# Altium PCB DE-130817.PcbDoc (part 1 of 4)
Units mil, origin at the board's own origin, x right, y up, seen from the top; angles counter-clockwise.
Board outline 5915.54 x 7594.09 mil, 2 copper layers (Top Layer, Bottom Layer), stack 12.8 mil thick; 405 components, 290 nets, 1180 pads, 331 vias.
Unrouted connection lines stored in the file: 1.
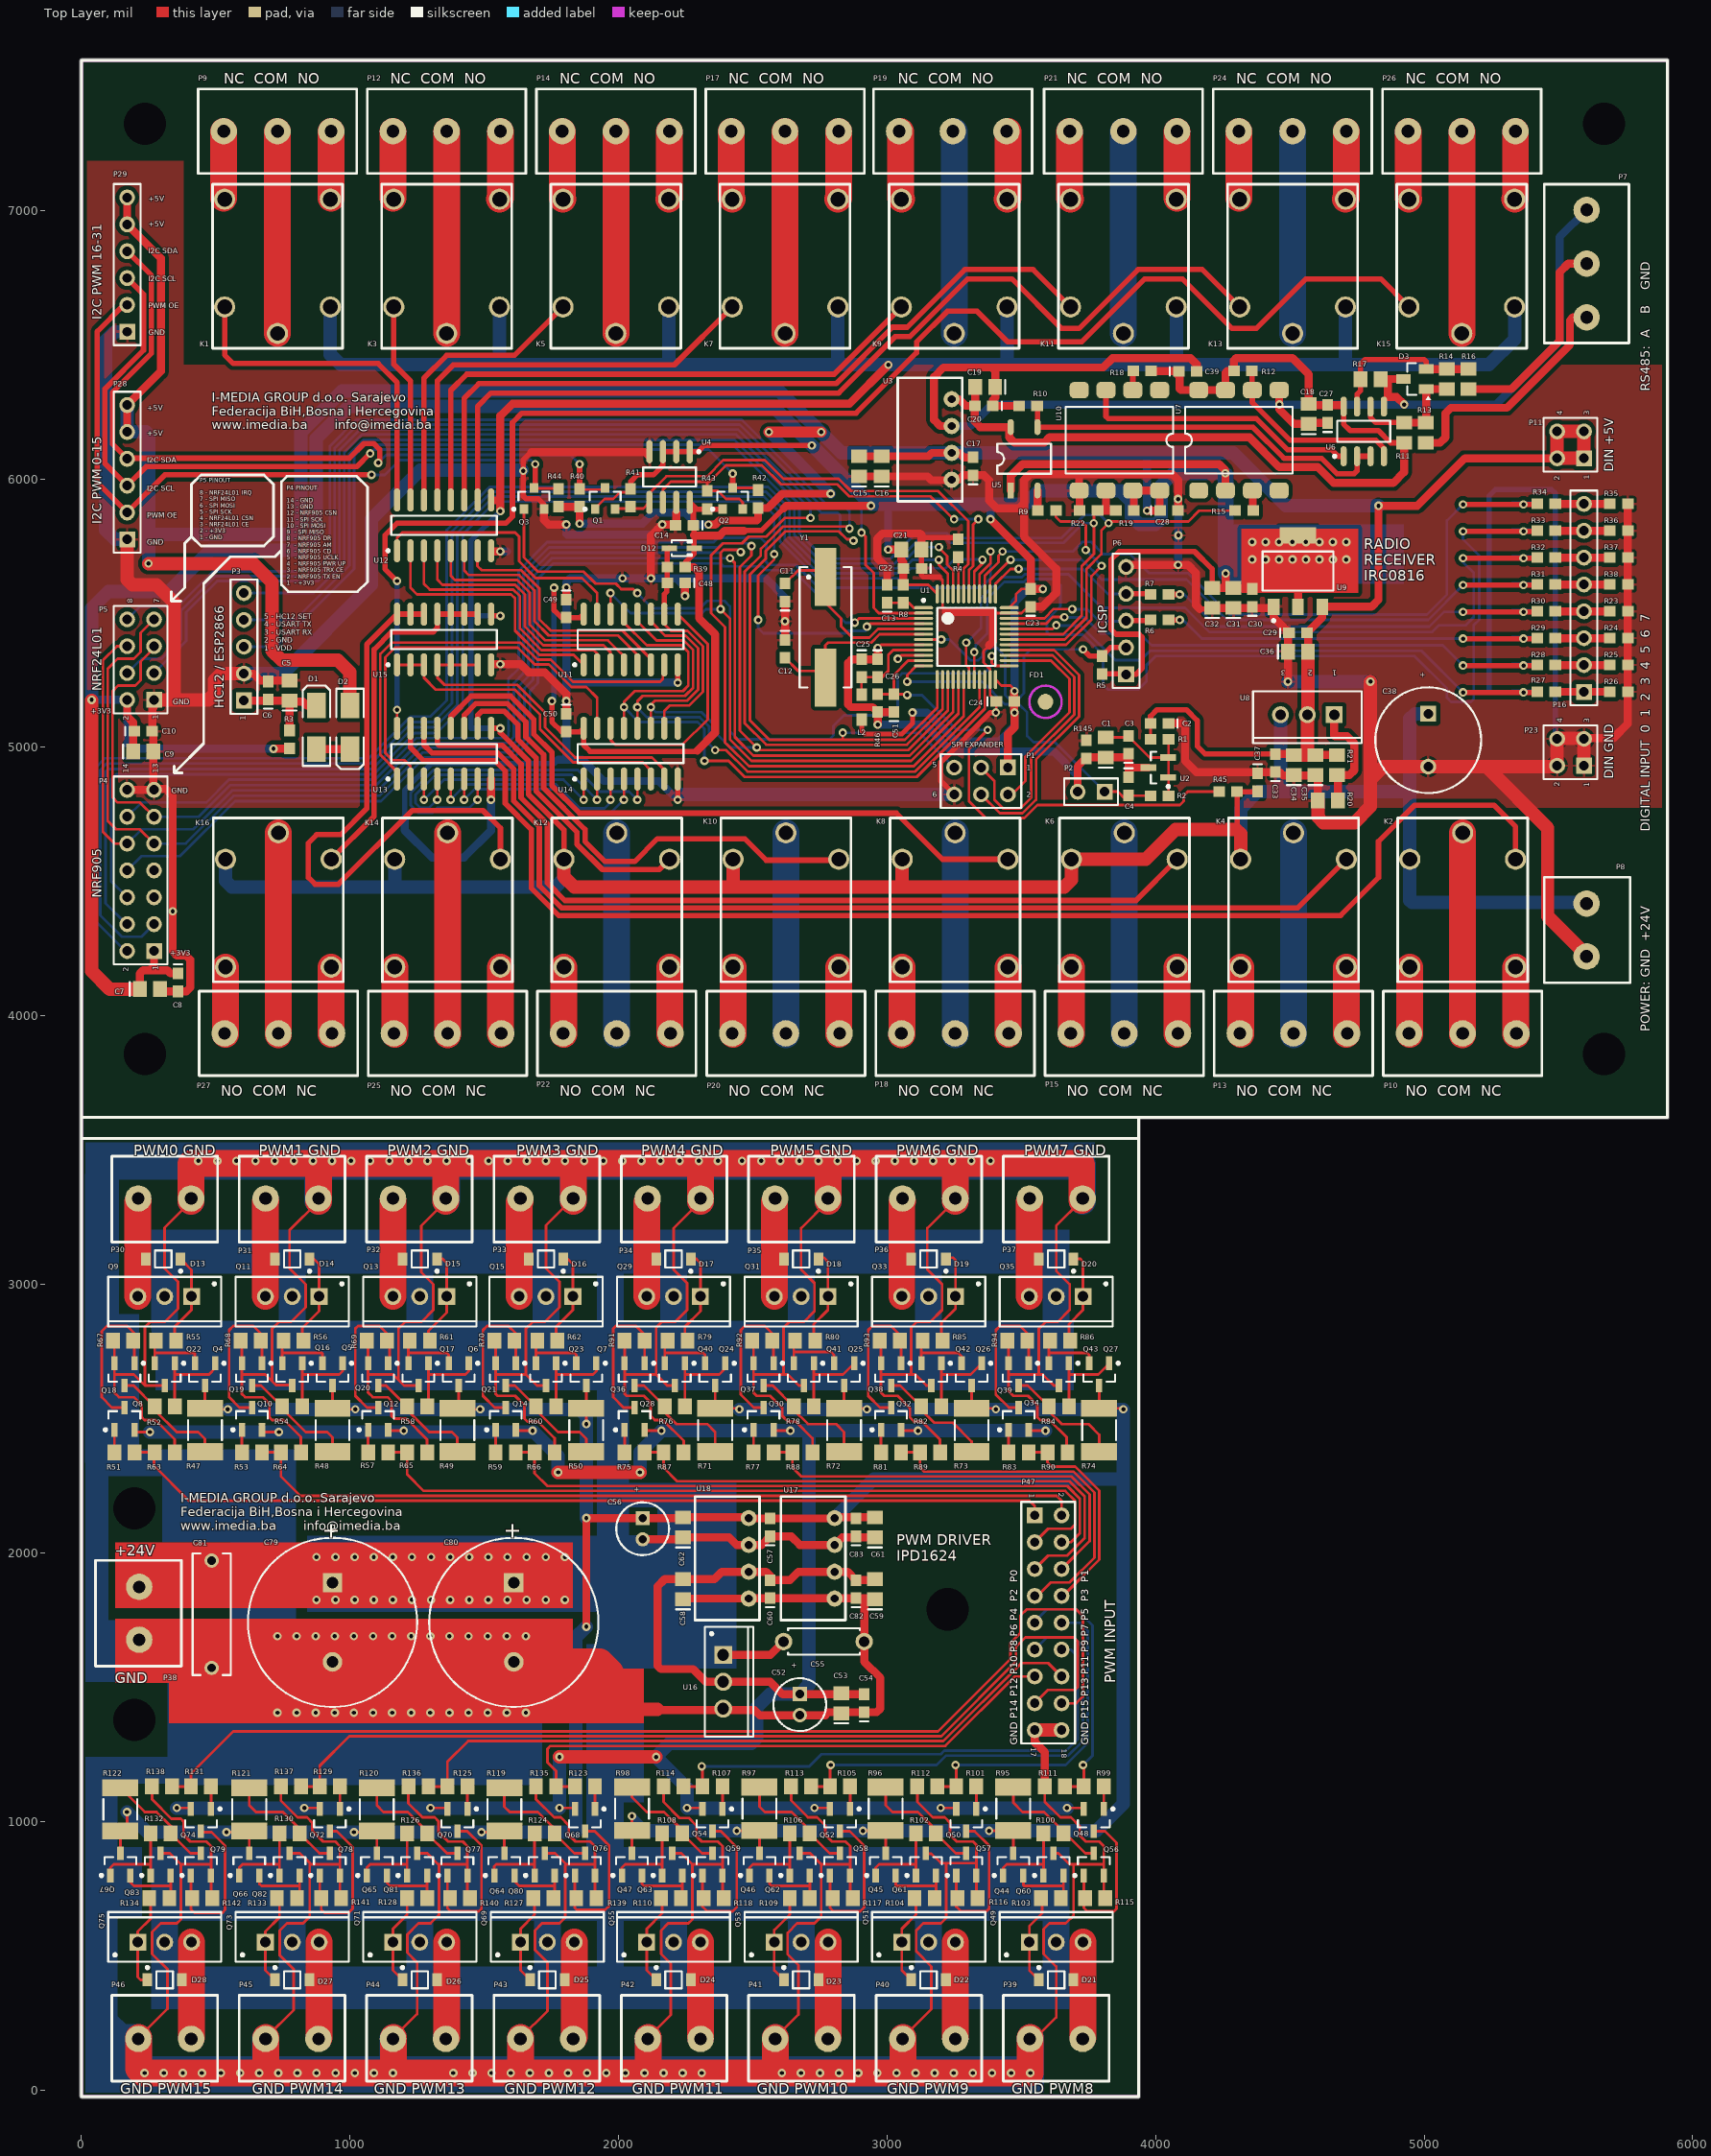
[diagram p0: Top Layer view]
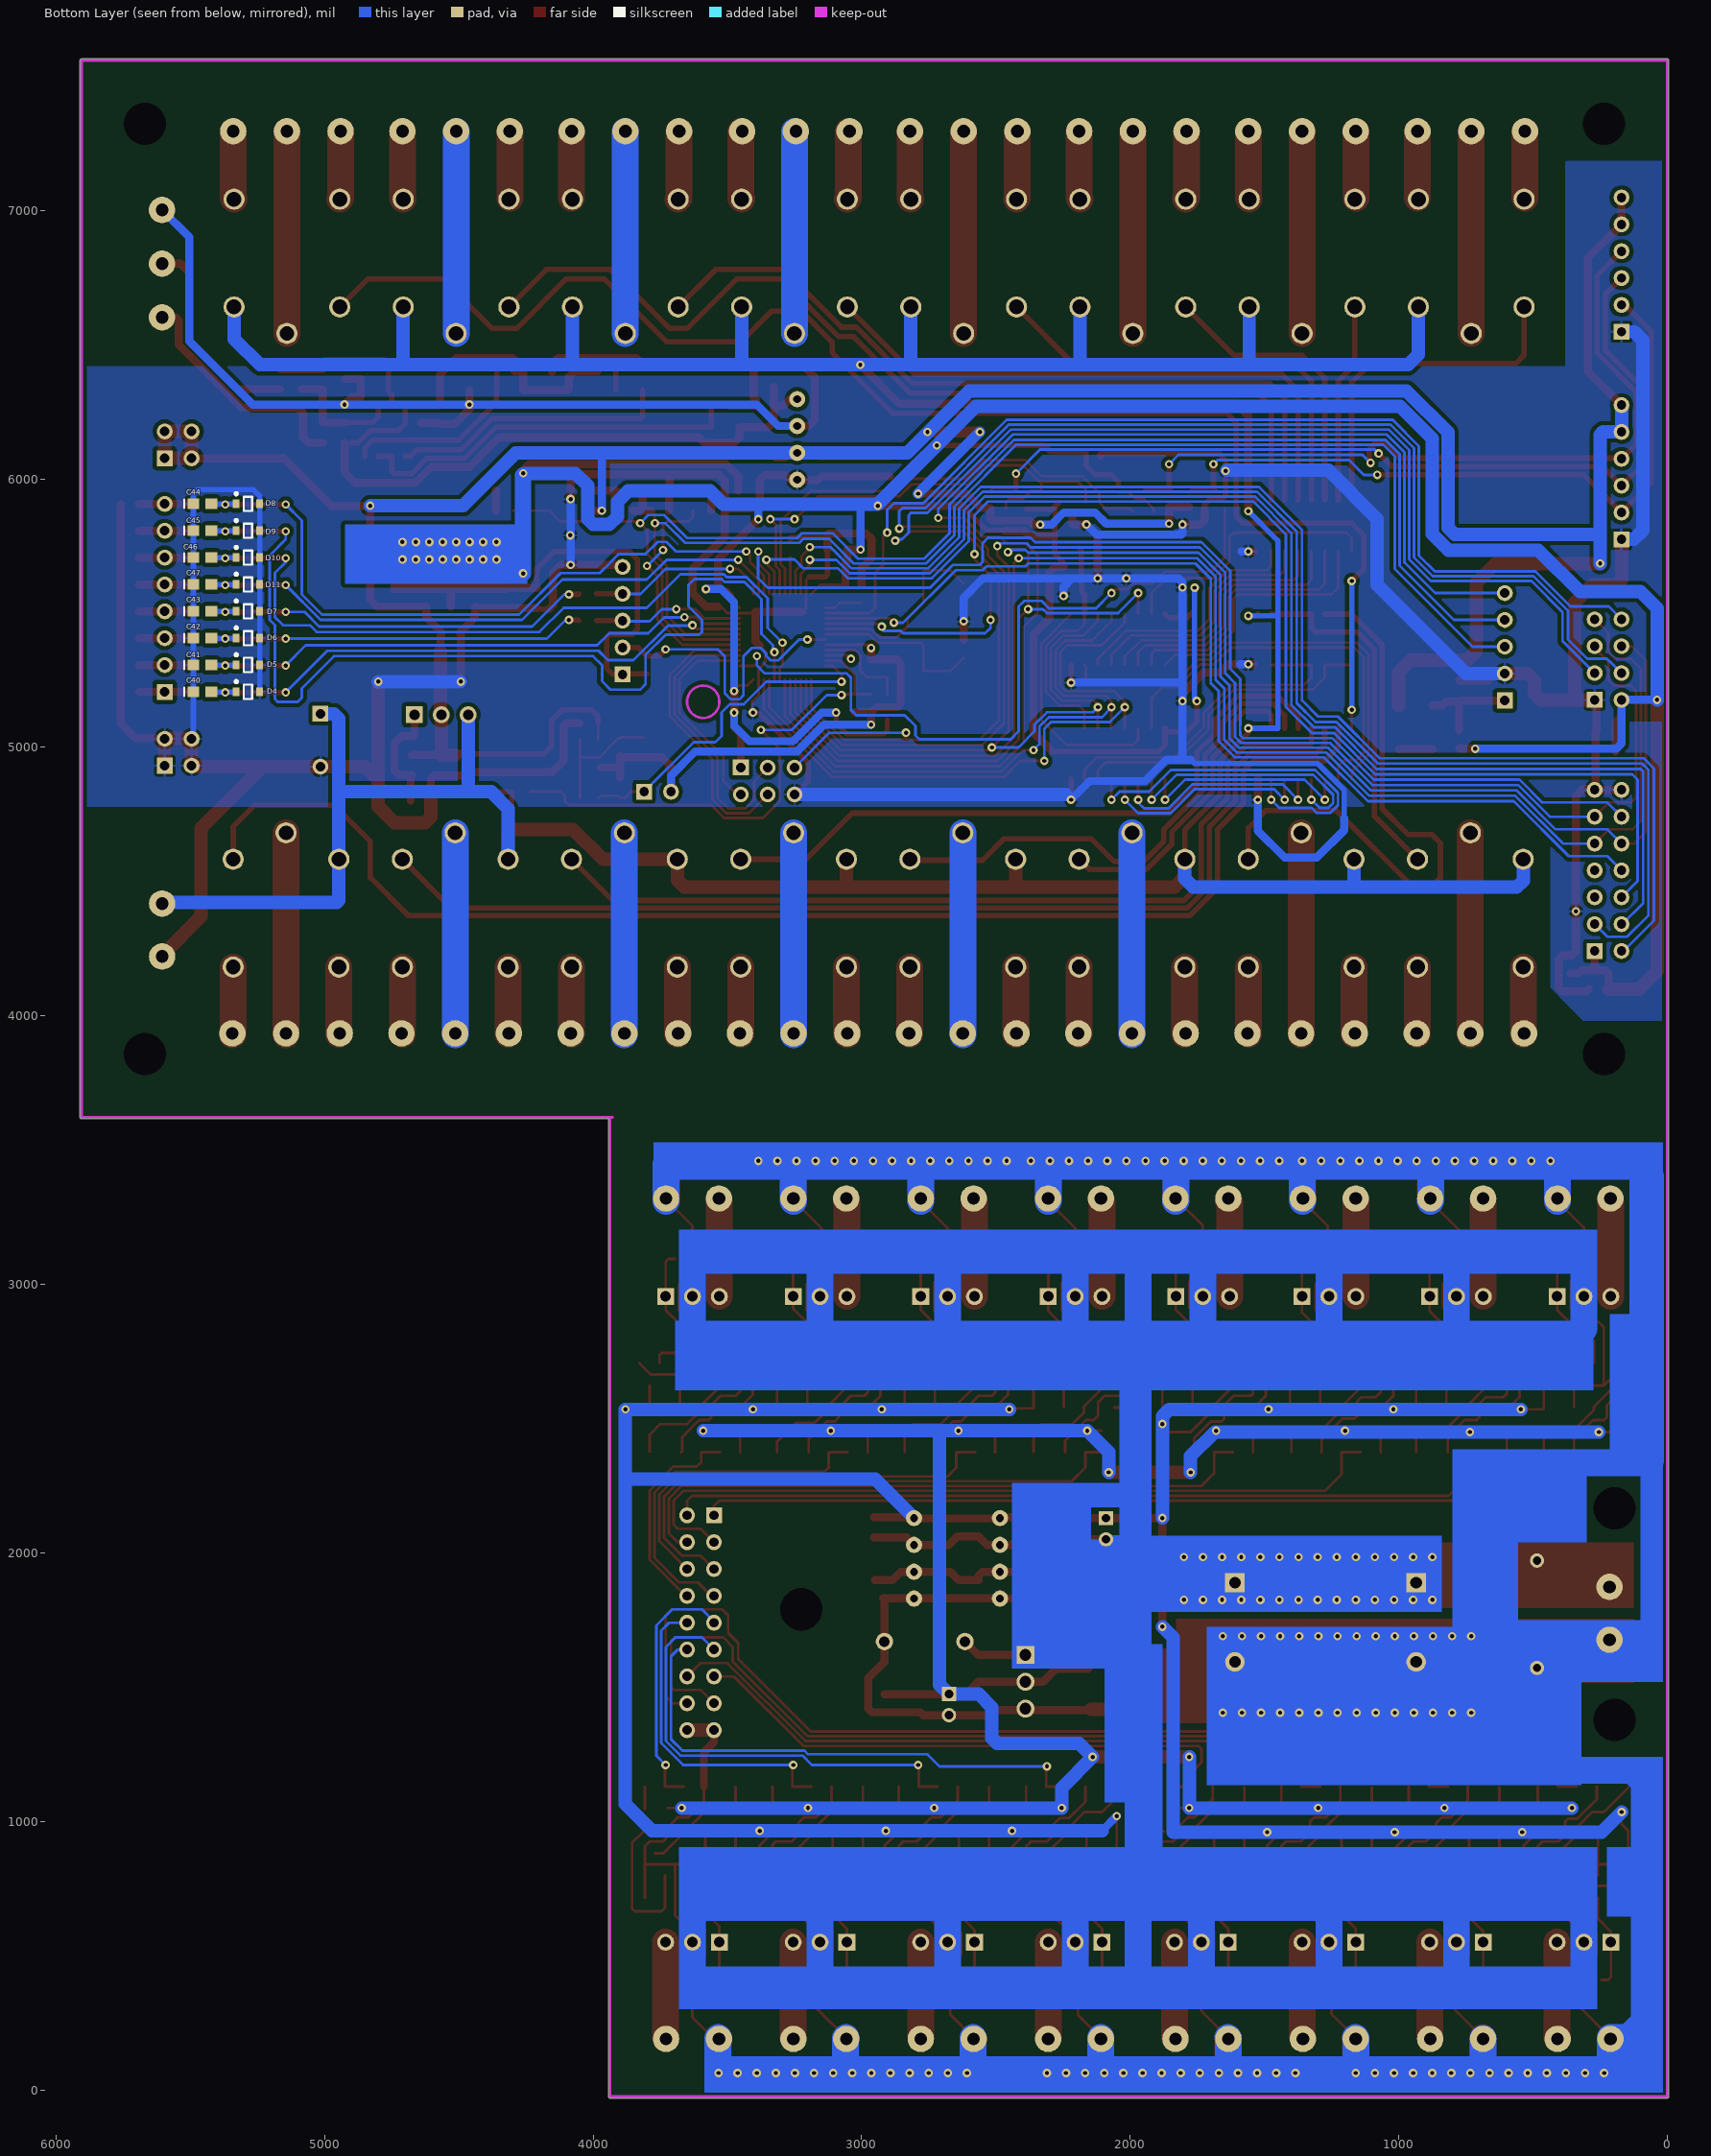
[diagram p1: Bottom Layer view, seen from below]

## Layer stack, top to bottom
Top Solder: solder mask 0.4, Solder Resist, Dk 3.5
Top Layer: signal copper 1.4
Dielectric 1: core 10, FR-4, Dk 4.2
Bottom Layer: signal copper 1.4
Bottom Solder: solder mask 0.4, Solder Resist, Dk 3.5

## Board outline
0,-30.02 cw(c0,-25) -5.02,-25 -5.02,7559.06 cw(c0,7559.06) 0,7564.07 5905.51,7564.07 cw(c5905.51,7559.06) 5910.53,7559.06 5910.53,3623.04 cw(c5905.51,3623.04) 5910.5,3622.54 cw(c5905.51,3622.05) 5910.53,3622.05 cw(c5905.51,3622.05) 5905.51,3617.03 3942.02,3617.03 3942.02,-25 cw(c3937.01,-25) 3937.01,-30.02

## Design rules (kind name [scope] priority, off if disabled: settings)
Clearance [All] p1: gap=10 ignorepadtopadclearanceinfootprint=FALSE except(0: Arc-Hole Track-Hole SMDPad-Hole THPad-Hole Via-Hole Fill-Hole Poly-Hole Region-Hole Text-Hole; 5: Arc-SMDPad Track-SMDPad SMDPad-SMDPad; 8: Arc-Track Track-Track; 15: Arc-Poly Track-Poly SMDPad-Poly THPad-Poly Via-Poly Fill-Poly Poly-Poly)
PolygonConnect [All] p1: connectstyle=Relief reliefconductorwidth=10 reliefentries=4 polygonreliefangle="90 Angle" airgapwidth=10
RoutingVias [All] p1: holewidth=28 width=50 viastyle="Through Hole" minholewidth=28 minwidth=50 maxholewidth=28 maxwidth=50
SolderMaskExpansion [All] p1: expansion=4
Width [All] p1: maxlimit=200 minlimit=10 preferedwidth=30
30 further rules are at their usual default settings.

## Classes and differential pairs
component class DE-130817_01: C1 C2 C3 C4 C5 C6 C7 C8 C9 C10 C11 C12 C13 C14 C15 C16 C17 C18 C19 C20 C21 C22 C23 C24 C25 C26 C27 C28 C29 C30 C31 C32 C33 C34 C35 C36 C37 C38 C39 D1 D2 D3 FD1 L2 P1 P2 P3 P4 P5 P6 P7 P8 R1 R2 R3 R4 R5 R6 R7 R8 R9 R10 R11 R12 R13 R14 R15 R16 R17 R18 R19 R20 R21 R22 R145 U1 U2 U3 U4 U5 U6 U7 U8 U9 U10 Y1
component class DE-130817_02: C40 C41 C42 C43 C44 C45 C46 C47 C48 C49 C50 C51 D4 D5 D6 D7 D8 D9 D10 D11 D12 K1 K2 K3 K4 K5 K6 K7 K8 K9 K10 K11 K12 K13 K14 K15 K16 P9 P10 P11 P12 P13 P14 P15 P16 P17 P18 P19 P20 P21 P22 P23 P24 P25 P26 P27 P28 P29 Q1 Q2 Q3 R23 R24 R25 R26 R27 R28 R29 R30 R31 R32 R33 R34 R35 R36 R37 R38 R39 R40 R41 R42 R43 R44 R45 R46 U11 U12 U13 U14 U15
component class DE-130817_03: C52 C53 C54 C55 C56 C57 C58 C59 C60 C61 C62 C79 C80 C81 C82 C83 D13 D14 D15 D16 D17 D18 D19 D20 D21 D22 D23 D24 D25 D26 D27 D28 P30 P31 P32 P33 P34 P35 P36 P37 P38 P39 P40 P41 P42 P43 P44 P45 P46 P47 Q4 Q5 Q6 Q7 Q8 Q9 Q10 Q11 Q12 Q13 Q14 Q15 Q16 Q17 Q18 Q19 Q20 Q21 Q22 Q23 Q24 Q25 Q26 Q27 Q28 Q29 Q30 Q31 Q32 Q33 Q34 Q35 Q36 Q37 Q38 Q39 Q40 Q41 Q42 Q43 Q44 Q45 Q46 Q47 Q48 Q49 Q50 Q51 Q52 Q53 Q54 Q55 Q56 Q57 Q58 Q59 Q60 Q61 Q62 Q63 Q64 Q65 Q66 Q67 Q68 Q69 Q70 Q71 Q72 Q73 Q74 Q75 Q76 Q77 Q78 Q79 Q80 Q81 Q82 Q83 R47 R48 R49 R50 R51 R52 R53 R54 R55 R56 R57 R58 R59 R60 R61 R62 R63 R64 R65 R66 R67 R68 R69 R70 R71 R72 R73 R74 R75 R76 R77 R78 R79 R80 R81 R82 R83 R84 R85 R86 R87 R88 R89 R90 R91 R92 R93 R94 R95 R96 R97 R98 R99 R100 R101 R102 R103 R104 R105 R106 R107 R108 R109 R110 R111 R112 R113 R114 R115 R116 R117 R118 R119 R120 R121 R122 R123 R124 R125 R126 R127 R128 R129 R130 R131 R132 R133 R134 R135 R136 R137 R138 R139 R140 R141 R142 U16 U17 U18

## Components (designator, comment, footprint, x,y, rotation, side; value= is the part's Value field where it differs from the comment)
C1 "10uF" 0805 3815,5000 r90 top
C2 "100nF" 0603 4015,5090 r180 top
C3 "100nF" 0603 3900,5010 r90 top
C4 "100nF" 0603 3900,4855 r270 top
C5 "10uF" 0805 775.32,5212 r90 top
C6 "100nF" 0603 695.32,5212 r90 top
C7 "10uF" 0805 255,4100 r0 top
C8 "100nF" 0603 360,4125 r270 top
C9 "10uF" 0805 230,4985 r0 top
C10 "100nF" 0603 230,5060 r0 top
C11 "22pF" 0603 2620.32,5577 r90 top
C12 "22pF" 0603 2620.32,5367 r270 top
C13 "100nF" 0603 3000.32,5572 r90 top
C14 "100nF" 0603 2245.32,5827 r180 top
C15 "10uF" 0805 2895.32,6047 r90 top
C16 "10uF" 0805 2980.32,6047 r90 top
C17 "100nF" 0603 3320.32,6047 r90 top
C18 "10uF" 0805 4570.32,6242 r90 top
C19 "10uF" 0805 3365.32,6342 r180 top
C20 "100nF" 0603 3360.32,6272 r180 top
C21 "10uF" 0805 3090.32,5737 r180 top
C22 "100nF" 0603 3095.32,5667 r180 top
C23 "100nF" 0603 3535.32,5557 r90 top
C24 "100nF" 0603 3440.32,5172 r0 top
C25 "1uF" 0603 2905,5295 r270 top
C26 "100nF" 0603 2965,5295 r270 top
C27 "100nF" 0603 4640.32,6242 r90 top
C28 "100nF" 0603 4050.32,5882 r0 top
C29 "100nF" 0603 4530.32,5427 r0 top
C30 "100nF" 0603 4360.32,5557 r90 top
C31 "10uF" 0805 4290.32,5557 r90 top
C32 "10uF" 0805 4210.32,5557 r90 top
C33 "100nF" 0603 4445.32,4942 r90 top
C34 "10uF" 0805 4515.32,4934.12 r90 top
C35 "10uF" 0805 4595.32,4934.12 r90 top
C36 "10uF" 0805 4530.32,5357 r0 top
C37 "100nF" 0603 4380,4870 r270 top
C38 "1000uF" CAPPR5-10x16 5015.32,5027 r270 top
C39 "100nF" 0603 4120,6400 r0 top
C40 "100nF" 0603 5455.32,5207 r180 bottom
C41 "100nF" 0603 5455.32,5307 r180 bottom
C42 "100nF" 0603 5455.32,5407 r180 bottom
C43 "100nF" 0603 5455.32,5507 r180 bottom
C44 "100nF" 0603 5455.32,5907 r180 bottom
C45 "100nF" 0603 5455.32,5807 r180 bottom
C46 "100nF" 0603 5455.32,5707 r180 bottom
C47 "100nF" 0603 5455.32,5607 r180 bottom
C48 "1uF" 0603 2215.32,5612 r180 top
C49 "100nF" 0603 1805.32,5517 r270 top
C50 "100nF" 0603 1805.32,5092 r270 top
C51 "100nF" 0603 3025,5165 r90 top
C52 "EKA00AA247F00" CAPPR2-5X11 2675,1435 r270 top value=47uF
C53 "10uF" 0805 2830,1440 r90 top
C54 "100nF" 0603 2915,1440 r90 top
C55 "VP52BY104" VP52-2.5 2765,1670 r180 top value=100nF
C56 "EKA00AA247F00" CAPPR2-5X11 2090,2090 r270 top value=47uF
C57 "100nF" 0603 2565,2095 r90 top
C58 "10uF" 0805 2240,1865 r90 top
C59 "10uF" 0805 2955,1865 r90 top
C60 "100nF" 0603 2565,1865 r90 top
C61 "10uF" 0805 2955,2095 r90 top
C62 "10uF" 0805 2240,2095 r90 top
C79 "EKA00JL422H00" CAPPR7.5-16X35.5 935,1741.63 r270 top value=2200uF
C80 "EKA00JL422H00" CAPPR7.5-16X35.5 1610,1741.63 r270 top value=2200uF
C81 "VP60BA104FB" VP60-3.6 485,1771.65 r90 top value=100nF
C82 "100nF" 0603 2885,1865 r90 top
C83 "100nF" 0603 2885,2095 r90 top
D1 "1N4001" SMA 875,5075 r90 top
D2 "1N4001" SMA 1000,5075 r270 top
D3 "SM712" SOT23_3L 4965.32,6372 r180 top
D4 "3V3" ONSC-SOD-323-2-477-02_V 5285.32,5207 r180 bottom
D5 "3V3" ONSC-SOD-323-2-477-02_V 5285.32,5307 r180 bottom
D6 "3V3" ONSC-SOD-323-2-477-02_V 5285.32,5407 r180 bottom
D7 "3V3" ONSC-SOD-323-2-477-02_V 5285.32,5507 r180 bottom
D8 "3V3" ONSC-SOD-323-2-477-02_V 5285.32,5907 r180 bottom
D9 "3V3" ONSC-SOD-323-2-477-02_V 5285.32,5807 r180 bottom
D10 "3V3" ONSC-SOD-323-2-477-02_V 5285.32,5707 r180 bottom
D11 "3V3" ONSC-SOD-323-2-477-02_V 5285.32,5607 r180 bottom
D12 "1N4148" SOD323 2235.32,5742 r0 top
D13 "SZMMSZ12T1G" ONSC-SOD-123-2-425-04_V 305,3095 r180 top value=12V
D14 "SZMMSZ12T1G" ONSC-SOD-123-2-425-04_V 785,3095 r180 top value=12V
D15 "SZMMSZ12T1G" ONSC-SOD-123-2-425-04_V 1260,3095 r180 top value=12V
D16 "SZMMSZ12T1G" ONSC-SOD-123-2-425-04_V 1730,3095 r180 top value=12V
D17 "SZMMSZ12T1G" ONSC-SOD-123-2-425-04_V 2205,3095 r180 top value=12V
D18 "SZMMSZ12T1G" ONSC-SOD-123-2-425-04_V 2680,3095 r180 top value=12V
D19 "SZMMSZ12T1G" ONSC-SOD-123-2-425-04_V 3155,3095 r180 top value=12V
D20 "SZMMSZ12T1G" ONSC-SOD-123-2-425-04_V 3630,3095 r180 top value=12V
D21 "SZMMSZ12T1G" ONSC-SOD-123-2-425-04_V 3630,410 r0 top value=12V
D22 "SZMMSZ12T1G" ONSC-SOD-123-2-425-04_V 3155,410 r0 top value=12V
D23 "SZMMSZ12T1G" ONSC-SOD-123-2-425-04_V 2680,410 r0 top value=12V
D24 "SZMMSZ12T1G" ONSC-SOD-123-2-425-04_V 2205,410 r0 top value=12V
D25 "SZMMSZ12T1G" ONSC-SOD-123-2-425-04_V 1735,410 r0 top value=12V
D26 "SZMMSZ12T1G" ONSC-SOD-123-2-425-04_V 1260,410 r0 top value=12V
D27 "SZMMSZ12T1G" ONSC-SOD-123-2-425-04_V 785,410 r0 top value=12V
D28 "SZMMSZ12T1G" ONSC-SOD-123-2-425-04_V 310,410 r0 top value=12V
FD1 "Fiducial" Fiducial 3590,5170 r0 top
K1 "SRA-5VDC-CL" SRA-5VDC-CL 730,6792 r90 top
K2 "SRA-5VDC-CL" SRA-5VDC-CL 5143.63,4432 r270 top
K3 "SRA-5VDC-CL" SRA-5VDC-CL 1360.05,6792 r90 top
K4 "SRA-5VDC-CL" SRA-5VDC-CL 4513.59,4432 r270 top
K5 "SRA-5VDC-CL" SRA-5VDC-CL 1990.09,6792 r90 top
K6 "SRA-5VDC-CL" SRA-5VDC-CL 3883.54,4432 r270 top
K7 "SRA-5VDC-CL" SRA-5VDC-CL 2620.14,6792 r90 top
K8 "SRA-5VDC-CL" SRA-5VDC-CL 3253.5,4432 r270 top
K9 "SRA-5VDC-CL" SRA-5VDC-CL 3250.18,6792 r90 top
K10 "SRA-5VDC-CL" SRA-5VDC-CL 2623.45,4432 r270 top
K11 "SRA-5VDC-CL" SRA-5VDC-CL 3880.23,6792 r90 top
K12 "SRA-5VDC-CL" SRA-5VDC-CL 1993.41,4432 r270 top
K13 "SRA-5VDC-CL" SRA-5VDC-CL 4510.27,6792 r90 top
K14 "SRA-5VDC-CL" SRA-5VDC-CL 1363.36,4432 r270 top
K15 "SRA-5VDC-CL" SRA-5VDC-CL 5140.32,6792 r90 top
K16 "SRA-5VDC-CL" SRA-5VDC-CL 733.32,4432 r270 top
L2 "120R" SMD-0805 2905,5150 r90 top
P1 "SPI2_EXP" HDR2X3 3450,4925 r180 top
P2 "10K NTC" HDR1X2 3810,4835 r180 top
P3 "HC12_RADIO" HDR1X5 605,5175 r90 top
P4 "nRF905" HDR2X7 270.32,4242 r90 top
P5 "NRF24L01" HDR2X4 270.32,5177 r90 top
P6 "ULINK_ICSP" HDR1X5 3890.32,5272 r90 top
P7 "TERMINAL BLOK 3" "TERMINAL BLOK 3" 5605.32,6801.84 r180 top
P8 "TERMINAL BLOK 2" "TERMINAL BLOK 2" 5605,4320 r0 top
P9 "TERMINAL BLOK 3" "TERMINAL BLOK 3" 730,7295 r90 top
P10 "TERMINAL BLOK 3" "TERMINAL BLOK 3" 5143.63,3935 r270 top
P11 "DIN_VCC" HDR2X2 5595.32,6077 r90 top
P12 "TERMINAL BLOK 3" "TERMINAL BLOK 3" 1360.05,7295 r90 top
P13 "TERMINAL BLOK 3" "TERMINAL BLOK 3" 4513.59,3935 r270 top
P14 "TERMINAL BLOK 3" "TERMINAL BLOK 3" 1990.09,7295 r90 top
P15 "TERMINAL BLOK 3" "TERMINAL BLOK 3" 3883.54,3935 r270 top
P16 "DIGITAL_INPUT" HDR1X8 5595.32,5207 r90 top
P17 "TERMINAL BLOK 3" "TERMINAL BLOK 3" 2620.14,7295 r90 top
P18 "TERMINAL BLOK 3" "TERMINAL BLOK 3" 3253.5,3935 r270 top
P19 "TERMINAL BLOK 3" "TERMINAL BLOK 3" 3245,7295 r90 top
P20 "TERMINAL BLOK 3" "TERMINAL BLOK 3" 2623.45,3935 r270 top
P21 "TERMINAL BLOK 3" "TERMINAL BLOK 3" 3880,7295 r90 top
P22 "TERMINAL BLOK 3" "TERMINAL BLOK 3" 1993.41,3935 r270 top
P23 "DIN_VSS" HDR2X2 5595.32,4932 r90 top
P24 "TERMINAL BLOK 3" "TERMINAL BLOK 3" 4510,7295 r90 top
P25 "TERMINAL BLOK 3" "TERMINAL BLOK 3" 1363.36,3935 r270 top
P26 "TERMINAL BLOK 3" "TERMINAL BLOK 3" 5140.32,7295 r90 top
P27 "TERMINAL BLOK 3" "TERMINAL BLOK 3" 733.32,3935 r270 top
P28 "I2C_PWM_0_15" HDR1X6 170.32,5775 r90 top
P29 "I2C_PWM_16_31" HDR1X6 170.32,6548.18 r90 top
P30 "TERMINAL BLOK 2" "TERMINAL BLOK 2" 310,3320 r270 top
P31 "TERMINAL BLOK 2" "TERMINAL BLOK 2" 784.29,3320 r270 top
P32 "TERMINAL BLOK 2" "TERMINAL BLOK 2" 1258.57,3320 r270 top
P33 "TERMINAL BLOK 2" "TERMINAL BLOK 2" 1732.86,3320 r270 top
P34 "TERMINAL BLOK 2" "TERMINAL BLOK 2" 2207.14,3320 r270 top
P35 "TERMINAL BLOK 2" "TERMINAL BLOK 2" 2681.43,3320 r270 top
P36 "TERMINAL BLOK 2" "TERMINAL BLOK 2" 3155.71,3320 r270 top
P37 "TERMINAL BLOK 2" "TERMINAL BLOK 2" 3630,3320 r270 top
P38 "TERMINAL BLOK 2" "TERMINAL BLOK 2" 215,1775 r180 top
P39 "TERMINAL BLOK 2" "TERMINAL BLOK 2" 3630,190 r90 top
P40 "TERMINAL BLOK 2" "TERMINAL BLOK 2" 3155.71,190 r90 top
P41 "TERMINAL BLOK 2" "TERMINAL BLOK 2" 2681.43,190 r90 top
P42 "TERMINAL BLOK 2" "TERMINAL BLOK 2" 2207.14,190 r90 top
P43 "TERMINAL BLOK 2" "TERMINAL BLOK 2" 1732.86,190 r90 top
P44 "TERMINAL BLOK 2" "TERMINAL BLOK 2" 1258.57,190 r90 top
P45 "TERMINAL BLOK 2" "TERMINAL BLOK 2" 784.29,190 r90 top
P46 "TERMINAL BLOK 2" "TERMINAL BLOK 2" 310,190 r90 top
P47 "Header 9X2" HDR2X9 3550,2140 r270 top
Q1 "BSS138LT1" ONSC-SOT-23-3-318-08_V 1950.32,5927 r90 top
Q2 "BSS138LT1" ONSC-SOT-23-3-318-08_V 2425.32,5927 r90 top
Q3 "BSS138LT1" ONSC-SOT-23-3-318-08_V 1685,5927 r90 top
Q4 "MMBT5551" SOT23_N 460,2665 r270 top
Q5 "MMBT5551" SOT23_N 935,2665 r270 top
Q6 "MMBT5551" SOT23_N 1405,2665 r270 top
Q7 "MMBT5551" SOT23_N 1880,2665 r270 top
Q8 "MMBT5401" SOT23_N 160,2500 r90 top
Q9 "IRF540N" TO-220AB 310,2955 r180 top
Q10 "MMBT5401" SOT23_N 635,2500 r90 top
Q11 "IRF540N" TO-220AB 785,2955 r180 top
Q12 "MMBT5401" SOT23_N 1105,2500 r90 top
Q13 "IRF540N" TO-220AB 1260,2955 r180 top
Q14 "MMBT5401" SOT23_N 1580,2500 r90 top
Q15 "IRF540N" TO-220AB 1730,2955 r180 top
Q16 "MMBT5401" SOT23_N 785,2665 r270 top
Q17 "MMBT5401" SOT23_N 1255,2665 r270 top
Q18 "BSS123" SOT23_N 160,2665 r270 top
Q19 "BSS123" SOT23_N 635,2665 r270 top
Q20 "BSS123" SOT23_N 1105,2665 r270 top
Q21 "BSS123" SOT23_N 1580,2665 r270 top
Q22 "MMBT5401" SOT23_N 310,2665 r270 top
Q23 "MMBT5401" SOT23_N 1730,2665 r270 top
Q24 "MMBT5551" SOT23_N 2360,2665 r270 top
Q25 "MMBT5551" SOT23_N 2840,2665 r270 top
Q26 "MMBT5551" SOT23_N 3315,2665 r270 top
Q27 "MMBT5551" SOT23_N 3790,2665 r270 top
Q28 "MMBT5401" SOT23_N 2060,2500 r90 top
Q29 "IRF540N" TO-220AB 2205,2955 r180 top
Q30 "MMBT5401" SOT23_N 2540,2500 r90 top
Q31 "IRF540N" TO-220AB 2680,2955 r180 top
Q32 "MMBT5401" SOT23_N 3015,2500 r90 top
Q33 "IRF540N" TO-220AB 3155,2955 r180 top
Q34 "MMBT5401" SOT23_N 3490,2500 r90 top
Q35 "IRF540N" TO-220AB 3630,2955 r180 top
Q36 "BSS123" SOT23_N 2060,2665 r270 top
Q37 "BSS123" SOT23_N 2540,2665 r270 top
Q38 "BSS123" SOT23_N 3015,2665 r270 top
Q39 "BSS123" SOT23_N 3490,2665 r270 top
Q40 "MMBT5401" SOT23_N 2210,2665 r270 top
Q41 "MMBT5401" SOT23_N 2690,2665 r270 top
Q42 "MMBT5401" SOT23_N 3165,2665 r270 top
Q43 "MMBT5401" SOT23_N 3640,2665 r270 top
Q44 "MMBT5551" SOT23_N 3470,840 r90 top
Q45 "MMBT5551" SOT23_N 2995,840 r90 top
Q46 "MMBT5551" SOT23_N 2525,840 r90 top
Q47 "MMBT5551" SOT23_N 2050,840 r90 top
Q48 "MMBT5401" SOT23_N 3770,1005 r270 top
Q49 "IRF540N" TO-220AB 3630,550 r0 top
Q50 "MMBT5401" SOT23_N 3295,1005 r270 top
Q51 "IRF540N" TO-220AB 3155,550 r0 top
Q52 "MMBT5401" SOT23_N 2825,1005 r270 top
Q53 "IRF540N" TO-220AB 2680,550 r0 top
Q54 "MMBT5401" SOT23_N 2350,1005 r270 top
Q55 "IRF540N" TO-220AB 2205,550 r0 top
Q56 "BSS123" SOT23_N 3770,840 r90 top
Q57 "BSS123" SOT23_N 3295,840 r90 top
Q58 "BSS123" SOT23_N 2825,840 r90 top
Q59 "BSS123" SOT23_N 2350,840 r90 top
Q60 "MMBT5401" SOT23_N 3620,840 r90 top
Q61 "MMBT5401" SOT23_N 3145,840 r90 top
Q62 "MMBT5401" SOT23_N 2675,840 r90 top
Q63 "MMBT5401" SOT23_N 2200,840 r90 top
Q64 "MMBT5551" SOT23_N 1575,840 r90 top
Q65 "MMBT5551" SOT23_N 1100,840 r90 top
Q66 "MMBT5551" SOT23_N 625,840 r90 top
Q67 "MMBT5551" SOT23_N 145,840 r90 top
Q68 "MMBT5401" SOT23_N 1875,1005 r270 top
Q69 "IRF540N" TO-220AB 1735,550 r0 top
Q70 "MMBT5401" SOT23_N 1400,1005 r270 top
Q71 "IRF540N" TO-220AB 1260,550 r0 top
Q72 "MMBT5401" SOT23_N 925,1005 r270 top
Q73 "IRF540N" TO-220AB 785,550 r0 top
Q74 "MMBT5401" SOT23_N 445,1005 r270 top
Q75 "IRF540N" TO-220AB 310,550 r0 top
Q76 "BSS123" SOT23_N 1875,840 r90 top
Q77 "BSS123" SOT23_N 1400,840 r90 top
Q78 "BSS123" SOT23_N 925,840 r90 top
Q79 "BSS123" SOT23_N 445,840 r90 top
Q80 "MMBT5401" SOT23_N 1725,840 r90 top
Q81 "MMBT5401" SOT23_N 1250,840 r90 top
Q82 "MMBT5401" SOT23_N 775,840 r90 top
Q83 "MMBT5401" SOT23_N 295,840 r90 top
R1 "820R" ERA-0603 4015,5030 r180 top
R2 "2K2" ERA-0603 4015,4820 r0 top
R3 "NF" ERA-0603 775,5030 r270 top
R4 "10K" ERA-0603 3265.32,5742 r90 top
R5 "10K" ERA-0603 3800.32,5307 r270 top
R6 "100R" ERA-0603 4015,5475 r0 top
R7 "100R" ERA-0603 4015,5570 r0 top
R8 "0R" ERA-0603 3060.32,5572 r90 top
R9 "330R" ERA-0603 3595.32,5882 r0 top
R10 "470R" ERA-0603 3525.32,6272 r180 top
R11 "820R" ERA-0805 4925.32,6172 r270 top
R12 "470R" ERA-0603 4325.32,6402 r0 top
R13 "10R" ERA-0805 5005.32,6172 r270 top
R14 "120R" ERA-0805 5085.32,6372 r270 top
R15 "330R" ERA-0603 4330,5882 r0 top
R16 "10R" ERA-0805 5165.32,6372 r270 top
R17 "820R" ERA-0805 4800.32,6372 r180 top
R18 "330R" ERA-0603 3950.32,6402 r0 top
R19 "510R" ERA-0603 3885.32,5882 r180 top
R20 "1K" ERA-0805 4641.85,4802 r180 top
R21 "330R" ERA-0805 4675.32,4934.13 r270 top
R22 "1K" ERA-0603 3750.32,5882 r0 top
R23 "10K" ERA-0603 5725.32,5507 r180 top
R24 "10K" ERA-0603 5725.32,5407 r180 top
R25 "10K" ERA-0603 5725.32,5307 r180 top
R26 "10K" ERA-0603 5725.32,5207 r180 top
R27 "10K" ERA-0603 5455.32,5207 r180 top
R28 "10K" ERA-0603 5455.32,5307 r180 top
R29 "10K" ERA-0603 5455.32,5407 r180 top
R30 "10K" ERA-0603 5455.32,5507 r180 top
R31 "10K" ERA-0603 5455.32,5607 r180 top
R32 "10K" ERA-0603 5455.32,5707 r180 top
R33 "10K" ERA-0603 5455.32,5807 r180 top
R34 "10K" ERA-0603 5455.32,5907 r180 top
R35 "10K" ERA-0603 5725.32,5907 r180 top
R36 "10K" ERA-0603 5725.32,5807 r180 top
R37 "10K" ERA-0603 5725.32,5707 r180 top
R38 "10K" ERA-0603 5725.32,5607 r180 top
R39 "100K" ERA-0603 2215.32,5671.57 r0 top
R40 "10K" ERA-0603 1855,5930 r270 top
R41 "2K2" ERA-0603 2045.32,5929.89 r90 top
R42 "10K" ERA-0603 2520,5925 r270 top
R43 "2K2" ERA-0603 2330.32,5922 r270 top
R44 "10K" ERA-0603 1777,5930 r270 top
R45 "330K" ERA-0603 4270,4835 r0 top
R46 "39K" ERA-0603 2965,5165 r90 top
R47 "10K" 12-1812 460,2457.68 r90 top
R48 "10K" 12-1812 935,2457.68 r90 top
R49 "10K" 12-1812 1400,2457.68 r90 top
R50 "10K" 12-1812 1880,2457.68 r90 top
R51 "1K" ERA-0805 160,2375 r180 top
R52 "100R" ERA-0805 310,2545.21 r180 top
R53 "1K" ERA-0805 635,2375 r180 top
R54 "100R" ERA-0805 785,2545.21 r180 top
R55 "100R" ERA-0805 315,2790 r0 top
R56 "100R" ERA-0805 790,2790 r0 top
R57 "1K" ERA-0805 1105,2375 r180 top
R58 "100R" ERA-0805 1250,2545.21 r180 top
R59 "1K" ERA-0805 1580,2375 r180 top
R60 "100R" ERA-0805 1730,2545.21 r180 top
R61 "100R" ERA-0805 1260,2790 r0 top
R62 "100R" ERA-0805 1735,2790 r0 top
R63 "10K" ERA-0805 310,2375 r180 top
R64 "10K" ERA-0805 780,2375 r180 top
R65 "10K" ERA-0805 1250,2375 r180 top
R66 "10K" ERA-0805 1725,2375 r180 top
R67 "1K" ERA-0805 155,2790 r180 top
R68 "1K" ERA-0805 630,2790 r180 top
R69 "1K" ERA-0805 1100,2790 r180 top
R70 "1K" ERA-0805 1575,2790 r180 top
R71 "10K" 12-1812 2360,2457.68 r90 top
R72 "10K" 12-1812 2840,2457.68 r90 top
R73 "10K" 12-1812 3315,2457.68 r90 top
R74 "10K" 12-1812 3790,2457.68 r90 top
R75 "1K" ERA-0805 2060,2375 r180 top
R76 "100R" ERA-0805 2210,2545.21 r180 top
R77 "1K" ERA-0805 2540,2375 r180 top
R78 "100R" ERA-0805 2690,2545.21 r180 top
R79 "100R" ERA-0805 2220,2790 r0 top
R80 "100R" ERA-0805 2695,2790 r0 top
R81 "1K" ERA-0805 3015,2375 r180 top
R82 "100R" ERA-0805 3165,2545.21 r180 top
R83 "1K" ERA-0805 3490,2375 r180 top
R84 "100R" ERA-0805 3640,2545.21 r180 top
R85 "100R" ERA-0805 3170,2790 r0 top
R86 "100R" ERA-0805 3645,2790 r0 top
R87 "10K" ERA-0805 2205,2375 r180 top
R88 "10K" ERA-0805 2685,2375 r180 top
R89 "10K" ERA-0805 3160,2375 r180 top
R90 "10K" ERA-0805 3635,2375 r180 top
R91 "1K" ERA-0805 2060,2790 r180 top
R92 "1K" ERA-0805 2535,2790 r180 top
R93 "1K" ERA-0805 3010,2790 r180 top
R94 "1K" ERA-0805 3485,2790 r180 top
R95 "10K" 12-1812 3470,1047.32 r270 top
R96 "10K" 12-1812 2995,1047.32 r270 top
R97 "10K" 12-1812 2525,1047.32 r270 top
R98 "10K" 12-1812 2050,1047.32 r270 top
R99 "1K" ERA-0805 3770,1130 r0 top
R100 "100R" ERA-0805 3620,954.79 r0 top
R101 "1K" ERA-0805 3295,1130 r0 top
R102 "100R" ERA-0805 3145,954.79 r0 top
R103 "100R" ERA-0805 3610,715 r180 top
R104 "100R" ERA-0805 3140,715 r180 top
R105 "1K" ERA-0805 2825,1130 r0 top
R106 "100R" ERA-0805 2675,954.79 r0 top
R107 "1K" ERA-0805 2350,1130 r0 top
R108 "100R" ERA-0805 2200,955 r0 top
R109 "100R" ERA-0805 2675,715 r180 top
R110 "100R" ERA-0805 2195,715 r180 top
R111 "10K" ERA-0805 3625,1130 r0 top
R112 "10K" ERA-0805 3150,1130 r0 top
R113 "10K" ERA-0805 2680,1130 r0 top
R114 "10K" ERA-0805 2205,1130 r0 top
R115 "1K" ERA-0805 3775,715 r0 top
R116 "1K" ERA-0805 3300,715 r0 top
R117 "1K" ERA-0805 2835,715 r0 top
R118 "1K" ERA-0805 2355,715 r0 top
R119 "10K" 12-1812 1575,1045 r270 top
R120 "10K" 12-1812 1100,1045 r270 top
R121 "10K" 12-1812 625,1045 r270 top
R122 "10K" 12-1812 145,1045 r270 top
R123 "1K" ERA-0805 1875,1130 r0 top
R124 "100R" ERA-0805 1725,955 r0 top
R125 "1K" ERA-0805 1400,1130 r0 top
R126 "100R" ERA-0805 1250,955 r0 top
R127 "100R" ERA-0805 1720,715 r180 top
R128 "100R" ERA-0805 1250,715 r180 top
R129 "1K" ERA-0805 925,1130 r0 top
R130 "100R" ERA-0805 775,955 r0 top
R131 "1K" ERA-0805 445,1130 r0 top
R132 "100R" ERA-0805 295,955 r0 top
R133 "100R" ERA-0805 765,715 r180 top
R134 "100R" ERA-0805 290,715 r180 top
R135 "10K" ERA-0805 1730,1130 r0 top
R136 "10K" ERA-0805 1255,1130 r0 top
R137 "10K" ERA-0805 780,1130 r0 top
R138 "10K" ERA-0805 300,1130 r0 top
R139 "1K" ERA-0805 1880,715 r0 top
R140 "1K" ERA-0805 1410,715 r0 top
R141 "1K" ERA-0805 930,715 r0 top
R142 "1K" ERA-0805 450,715 r0 top
R145 "0R" ERA-0603 3742.6,4992.86 r270 top
U1 "STM32F103C8T6" STM-LQFP48_N 3295.32,5412 r0 top
U2 "TL431CL3T" SOT23-3_N 4010,4925 r180 top
U3 "B0505S/D-1W" B0505S-1W 3240.32,5997 r90 top
U4 "AT24C1024" SOIC-SN8_N 2190.32,6007 r270 top
U5 "PS2501L" SOP4 3460.32,5957 r90 top
U6 "SN75176BD" D008_L 4775.32,6177 r90 top
U7 "6N137" SMD-8 4160.32,5957 r90 top
U8 "LM317MT" 221A-06 4565.32,5122 r180 top
U9 "REG1117-3.3" ZZ311 4530.32,5657 r0 top
U10 "6N137" SMD-8 4015.32,6331.02 r270 top
U11 "MC74HC595AD" 751B-05_N 2045.32,5402 r90 top
U12 "ULN2003D" SO16_N 1350.32,5827 r90 top
U13 "ULN2003D" SO16_N 1350.32,4977 r90 top
U14 "MC74HC595AD" 751B-05_N 2045.32,4977 r90 top
U15 "ULN2003D" SO16_N 1350.32,5402 r90 top
U16 "STEP DOWN BUCK" TO220 2390,1520 r270 top
U17 "B0512S/D-1W" B0505S-1W 2805,1830 r90 top
U18 "B0512S/D-1W" B0505S-1W 2485,1830 r90 top
Y1 "8MHz" HC49/4H_SMX 2770.88,5447.51 r270 top

## Footprints (in the part's own frame and the unit in brackets; to place one, negate y for a bottom-side part, rotate by r counter-clockwise, add the part's x,y. Pads: shape width x height; smd on the part's side, far side on the other; paste and mask are expansions set on the pad)
12-1812 [mm] "Chip Resistor; Body 4.5 x 3.2 mm (LxW typ)"
  rect 1.6x3.4 smd: 1(-2.05,0) 2(2.05,0)
  silkscreen extent -0.95,-1.6 0.95,1.6
221A-06 [mm] "TO, Thru-Hole, Vertical, Heatsink Mounted; 3 In-Line Leads; Pitch 2.54 mm"
  rect 1.6x1.6 hole 1: 1(-2.54,0)
  round 1.6 hole 1: 2(0,0) 3(2.54,0)
  silkscreen extent -5.15,-2.2 5.15,2.7, body extent -5.25,-2.3 5.25,2.8, height 19.7
0603 [mm] "Chip Capacitor; Body 1.6 x 0.8 mm (LxW typ)"
  rect 1.1x1 smd: 1(-0.85,0) 2(0.85,0)
  silkscreen extent -1.7,-0.4 -1.7,0.4
751B-05_N [mm] "SOIC, 16-Leads, Body 9.9x3.9mm, Pitch 1.27mm, IPC Medium Density"
  oval 2.2x0.6 smd: 1(-2.4,4.445) 2(-2.4,3.175) 3(-2.4,1.905) 4(-2.4,0.635) 5(-2.4,-0.635) 6(-2.4,-1.905) 7(-2.4,-3.175) 8(-2.4,-4.445) 9(2.4,-4.445) 10(2.4,-3.175) 11(2.4,-1.905) 12(2.4,-0.635) 13(2.4,0.635) 14(2.4,1.905) 15(2.4,3.175) 16(2.4,4.445)
  silkscreen extent -2.52,-5 0.9,5.42, body extent -2,-5 2,5, height 1.75
0805 [mm] "Chip Capacitor; Body 2.0 x 1.2 mm (LxW typ)"
  rect 1.3x1.5 smd: 1(-0.95,0) 2(0.95,0)
  silkscreen extent -1.9,-0.65 -1.9,0.65
B0505S-1W [mil] "Isolated DC DC converter"
  round 60 hole 30: 1(0,0) 2(100,0) 3(200,0) 4(300,0)
  silkscreen extent -80,-40 380,200, body extent -80,-40 380,200, height 394
CAPPR2-5X11 [mm] "Capacitor, Electrolytic, Radial; Body 5 x 11 mm (Dia.xH typ); Pin Spacing 2 mm (typ)"
  rect 1.35x1.35 hole 0.8: 1(-1,0)
  round 1.35 hole 0.8: 2(1,0)
  silkscreen extent -2.5,-2.5 2.5,2.5, body extent -2.5,-2.5 2.5,2.5, height 12
CAPPR5-10x16 [mm] "Capacitor, Electrolytic, Radial; Body 10 x 16 mm (Dia.xH typ); Pin Spacing 5 mm (typ)"
  rect 1.5x1.5 hole 0.9: 1(-2.5,0)
  round 1.5 hole 0.9: 2(2.5,0)
  silkscreen extent -5,-5 5,5, body extent -5,-5 5,5, height 18
CAPPR7.5-16X35.5 [mm] "Capacitor, Electrolytic, Radial; Body 16 x 35.5 mm (Dia.xH typ); Pin Spacing 7.5 mm (typ)"
  rect 1.85x1.85 hole 1.1: 1(-3.75,0)
  round 1.85 hole 1.1: 2(3.75,0)
  silkscreen extent -8,-8 8,8, body extent -8,-8 8,8, height 37.5
D008_L [mm] "SOIC, 8-Leads, Body 4.9x3.9mm, Pitch 1.27mm, IPC High Density"
  oval 1.9x0.6 smd: 1(-2.35,1.905) 2(-2.35,0.635) 3(-2.35,-0.635) 4(-2.35,-1.905) 5(2.35,-1.905) 6(2.35,-0.635) 7(2.35,0.635) 8(2.35,1.905)
  silkscreen extent -2.47,-2.5 1,2.88, body extent -2,-2.5 2,2.5, height 1.75
ERA-0603 [mm] "Chip Resistor; Body 1.6 x 0.8 mm (LxW typ)"
  rect 1.1x1 smd: 1(-0.85,0) 2(0.85,0)
ERA-0805 [mm] "Chip Resistor; Body 2 x 1.3 mm (LxW typ)"
  rect 1.3x1.5 smd: 1(-0.95,0) 2(0.95,0)
Fiducial [mm] "Pick and place machine mark"
  round 1.5 smd paste+0 mask+0.8: 3(0,0)
  Keep-Out Layer circle w0.254: c0,0 r1.529
HC49/4H_SMX [mm] "Surface Mount Quartz Crystal; Body 13.4 (inc. leads) x 4.9 mm (LxW max)"
  rect 5.5x2 smd: 1(-4.75,0) 2(4.75,0)
  silkscreen extent -5.7,-2.45 5.7,2.45
HDR1X2 [mm] "Connector; Header; 2 Position"
  rect 1.5x1.5 hole 0.9: 1(0,0)
  round 1.5 hole 0.9: 2(2.54,0)
  silkscreen extent -1.27,-1.27 3.81,1.27
HDR1X5 [mm] "Connector; Header; 5 Position"
  rect 1.5x1.5 hole 0.9: 1(0,0)
  round 1.5 hole 0.9: 2(2.54,0) 3(5.08,0) 4(7.62,0) 5(10.16,0)
  silkscreen extent -1.27,-1.27 11.43,1.27
HDR1X6 [mm] "Connector; Header; 6 Position"
  rect 1.5x1.5 hole 0.9: 1(0,0)
  round 1.5 hole 0.9: 2(2.54,0) 3(5.08,0) 4(7.62,0) 5(10.16,0) 6(12.7,0)
  silkscreen extent -1.27,-1.27 13.97,1.27
HDR1X8 [mm] "Connector; Header; 8 Position"
  rect 1.5x1.5 hole 0.9: 1(0,0)
  round 1.5 hole 0.9: 2(2.54,0) 3(5.08,0) 4(7.62,0) 5(10.16,0) 6(12.7,0) 7(15.24,0) 8(17.78,0)
  silkscreen extent -1.27,-1.27 19.05,1.27
HDR2X2 [mm] "Connector; Header; 2x2 Position"
  rect 1.5x1.5 hole 0.9: 1(0,0)
  round 1.5 hole 0.9: 2(0,2.54) 3(2.54,0) 4(2.54,2.54)
  silkscreen extent -1.27,-1.27 3.81,3.81
HDR2X3 [mm] "Connector; Header; 3x2 Position"
  rect 1.5x1.5 hole 0.9: 1(0,0)
  round 1.5 hole 0.9: 2(0,2.54) 3(2.54,0) 4(2.54,2.54) 5(5.08,0) 6(5.08,2.54)
  silkscreen extent -1.27,-1.27 6.35,3.81
HDR2X4 [mm] "Connector; Header; 4x2 Position"
  rect 1.5x1.5 hole 0.9: 1(0,0)
  round 1.5 hole 0.9: 2(0,2.54) 3(2.54,0) 4(2.54,2.54) 5(5.08,0) 6(5.08,2.54) 7(7.62,0) 8(7.62,2.54)
  silkscreen extent -1.27,-1.27 8.89,3.81
HDR2X7 [mm] "Connector; Header; 7x2 Position"
  rect 1.5x1.5 hole 0.9: 1(0,0)
  round 1.5 hole 0.9: 2(0,2.54) 3(2.54,0) 4(2.54,2.54) 5(5.08,0) 6(5.08,2.54) 7(7.62,0) 8(7.62,2.54) 9(10.16,0) 10(10.16,2.54) 11(12.7,0) 12(12.7,2.54) 13(15.24,0) 14(15.24,2.54)
  silkscreen extent -1.27,-1.27 16.51,3.81
HDR2X9 [mm] "Connector; Header; 9x2 Position"
  rect 1.5x1.5 hole 0.9: 1(0,0)
  round 1.5 hole 0.9: 2(0,2.54) 3(2.54,0) 4(2.54,2.54) 5(5.08,0) 6(5.08,2.54) 7(7.62,0) 8(7.62,2.54) 9(10.16,0) 10(10.16,2.54) 11(12.7,0) 12(12.7,2.54) 13(15.24,0) 14(15.24,2.54) 15(17.78,0) 16(17.78,2.54) 17(20.32,0) 18(20.32,2.54)
  silkscreen extent -1.27,-1.27 21.59,3.81
ONSC-SOD-123-2-425-04_V [mm] "SOD, 2-Leads, Body 2.69x1.6mm"
  rect 0.91x1.22 smd: 1(-1.635,0) 2(1.635,0)
  silkscreen extent -1.76,-0.8 0.78,1.28, body extent -1.35,-0.8 1.35,0.8, height 1.35
ONSC-SOD-323-2-477-02_V [mm] "SOD, 2-Leads, Body 1.7x1.25mm"
  rect 0.63x0.83 smd: 1(-1.115,0) 2(1.115,0)
  silkscreen extent -1.24,-0.67 0.4,1.09, body extent -0.85,-0.63 0.85,0.63, height 1.06
ONSC-SOT-23-3-318-08_V [mm] "SOT23, 3-Leads, Body 2.92x1.3mm, Pitch 0.95mm"
  rect 0.9x0.8 smd: 1(-1,0.95) 2(-1,-0.95) 3(1,0)
  silkscreen extent -1.12,-1.46 0.65,2.02, body extent -0.65,-1.46 0.65,1.46, height 1.11
SMA [mm] "DO-214-AC/SMA; 2 C-Bend Leads; Body 5 x 2.7 mm, inc. leads (LxW)"
  rect 2.4x1.8 smd: 1(-2.05,0) 2(2.05,0)
  silkscreen extent -3.65,-1.3 3.95,1.3
SMD-8 [mm]
  rrect50% 1.52x1.78 smd: 1(0,0) 2(0,-2.54) 3(0,-5.08) 4(0,-7.62) 5(9.5,-7.62) 6(9.5,-5.08) 7(9.5,-2.54) 8(9.5,0)
  silkscreen extent 1.59,-8.89 7.91,1.27, body extent 1.27,-8.89 8.38,1.27, height 3.55
SMD-0805 [mm] "Chip Inductor, 2-Leads, Body 2.0x1.2x1.1 mm"
  rect 1.15x1 smd: 1(-1.175,0) 2(1.175,0)
  body extent -1,-0.6 1,0.6, height 1.1
SO16_N [mm] "SOIC, 16-Leads, Body 9.9x3.9mm, Pitch 1.27mm, IPC Medium Density"
  oval 2.2x0.6 smd: 1(-2.4,4.445) 2(-2.4,3.175) 3(-2.4,1.905) 4(-2.4,0.635) 5(-2.4,-0.635) 6(-2.4,-1.905) 7(-2.4,-3.175) 8(-2.4,-4.445) 9(2.4,-4.445) 10(2.4,-3.175) 11(2.4,-1.905) 12(2.4,-0.635) 13(2.4,0.635) 14(2.4,1.905) 15(2.4,3.175) 16(2.4,4.445)
  silkscreen extent -2.52,-5 0.9,5.42, body extent -1.95,-4.95 1.95,4.95, height 1.75
SOD323 [mm] "SOD-323/SC-76; 2 Leads; Body 1.7 x 1.3 mm, (LxW)"
  rect 1.45x0.55 smd: 1(1.175,0) 2(-1.175,0)
  silkscreen extent -0.95,-0.75 0.95,0.75
SOIC-SN8_N [mm] "SOIC, 8-Leads, Body 4.9x3.8mm, Pitch 1.27mm, IPC Medium Density"
  oval 2.2x0.6 smd: 1(-2.4,1.905) 2(-2.4,0.635) 3(-2.4,-0.635) 4(-2.4,-1.905) 5(2.4,-1.905) 6(2.4,-0.635) 7(2.4,0.635) 8(2.4,1.905)
  silkscreen extent -2.52,-2.5 0.9,2.88, body extent -2,-2.5 2,2.5, height 1.75
SOP4 [mm]
  rect 1.5x0.6 smd: 1(0,0)
  oval 1.5x0.6 smd: 2(0,-2.54) 3(6,-2.54) 4(6,0)
  silkscreen extent 1.58,-3.81 4.42,1.27
SOT23-3_N [mm] "SOT23, 3-Leads, Body 2.9x1.3mm, Pitch 0.95mm, Lead Span 2.4mm, IPC Medium Density"
  rect 1.5x0.6 smd: 1(-0.95,0.95) 2(-0.95,-0.95) 3(0.95,0)
  silkscreen extent -1.07,-1.5 0.7,1.92, body extent -0.7,-1.52 0.7,1.52, height 1.12
SOT23_3L [mm] "SOT23, 3-Leads, Body 2.9x2.4mm, Pitch 0.95mm"
  rect 1.4x0.9 smd: 1(-1.075,0.95) 2(-1.075,-0.95) 3(1.075,0)
  silkscreen extent -1.52,-1.5 0.7,1.97, body extent -1.2,-1.45 1.2,1.45, height 1.1
SOT23_N [mm] "SOT23, 3-Leads, Body 2.9x1.3mm, Pitch 0.95mm, Lead Span 2.3mm, IPC Medium Density"
  rect 1.3x0.6 smd: 1(-1.05,0.95) 2(-1.05,-0.95) 3(1.05,0)
  silkscreen extent -1.17,-1.5 0.7,1.93, body extent -0.7,-1.5 0.7,1.5, height 1.1
SRA-5VDC-CL [mm] "SPDT PCB Relay 5Vdc coil"
  round 2 hole 1.4: 1(-6.35,0) 2(-3.85,-5) 3(6.35,-5) 4(6.35,5) 5(-3.85,5)
  silkscreen extent -7.75,-6.15 7.75,6.15, body extent -7.75,-6.1 7.75,6.1, height 14
STM-LQFP48_N [mm] "QFP, 48-Leads, Body 7x7mm, Pitch 0.5mm, IPC Medium Density"
  oval 1.8x0.3 smd: 1(-4.05,2.75) 2(-4.05,2.25) 3(-4.05,1.75) 4(-4.05,1.25) 5(-4.05,0.75) 6(-4.05,0.25) 7(-4.05,-0.25) 8(-4.05,-0.75) 9(-4.05,-1.25) 10(-4.05,-1.75) 11(-4.05,-2.25) 12(-4.05,-2.75) 25(4.05,-2.75) 26(4.05,-2.25) 27(4.05,-1.75) 28(4.05,-1.25) 29(4.05,-0.75) 30(4.05,-0.25) 31(4.05,0.25) 32(4.05,0.75) 33(4.05,1.25) 34(4.05,1.75) 35(4.05,2.25) 36(4.05,2.75)
  oval 0.3x1.8 smd: 13(-2.75,-4.05) 14(-2.25,-4.05) 15(-1.75,-4.05) 16(-1.25,-4.05) 17(-0.75,-4.05) 18(-0.25,-4.05) 19(0.25,-4.05) 20(0.75,-4.05) 21(1.25,-4.05) 22(1.75,-4.05) 23(2.25,-4.05) 24(2.75,-4.05) 37(2.75,4.05) 38(2.25,4.05) 39(1.75,4.05) 40(1.25,4.05) 41(0.75,4.05) 42(0.25,4.05) 43(-0.25,4.05) 44(-0.75,4.05) 45(-1.25,4.05) 46(-1.75,4.05) 47(-2.25,4.05) 48(-2.75,4.05)
  silkscreen extent -4.17,-2.75 2.75,3.57, body extent -3.5,-3.5 3.5,3.5, height 1.6
"TERMINAL BLOK 2" [mm] "2 pinski terminal blok konektor"
  round 2.5 hole 1.2: 1(0,-2.5) 2(0,2.5)
  silkscreen extent -4,-5 4.13,5
"TERMINAL BLOK 3" [mm] "3 pinski terminal blok konektor"
  round 2.5 hole 1.2: 1(0,5.08) 2(0,0) 3(0,-5.08)
  silkscreen extent -4,-7.5 4,7.5
TO220 [mm] "TO, Thru-Hole, Vertical, Heatsink Mounted; 3 In-Line Leads; Pitch 2.54 mm"
  rect 1.7x1.7 hole 1.1: 1(-2.54,0)
  round 1.7 hole 1.1: 2(0,0) 3(2.54,0)
  silkscreen extent -5.2,-1.75 5.2,2.85, body extent -5.25,-1.8 5.25,2.9, height 19.7
TO-220AB [mm] "TO, Thru-Hole, Vertical, Heatsink Mounted; 3 In-Line Leads; Pitch 2.54 mm"
  rect 1.6x1.6 hole 1: 1(-2.54,0)
  round 1.6 hole 1: 2(0,0) 3(2.54,0)
  silkscreen extent -5.35,-1.85 5.35,2.85, body extent -5.4,-1.9 5.4,2.9, height 19.3
VP52-2.5 [mm] "Capacitor, Ceramic, Thru-Hole, Dipped Radial; Body 6.8 x 2.5 mm (WxT) Pin Spacing 7.62 mm (typ)"
  round 1.65 hole 1: 1(-3.81,0) 2(3.81,0)
  silkscreen extent -3.4,-1.25 3.4,1.25
VP60-3.6 [mm] "Capacitor, Ceramic, Thru-Hole, Dipped Radial; Body 11.5 x 3.6 mm (WxT) Pin Spacing 10.16 mm (typ)"
  round 1.35 hole 0.8: 1(-5.08,0) 2(5.08,0)
  silkscreen extent -5.75,-1.8 5.75,1.8
ZZ311 [mm] "SOT-223/SC-73; 4 Leads; Body 6.7 x 7.3 mm, inc. leads (LxW max)"
  rect 1.1x1.55 smd: 1(-2.3,-3.375) 2(0,-3.375) 3(2.3,-3.375)
  rect 3.45x1.55 smd: 4(0,3.375)
  silkscreen extent -3.35,-4.82 3.35,1.85

## Part data
C1 C5 C7 C9 C15 C16 C18 C19 C21 C31 C32 C34 C35 C36 C53 C58 C59 C61 C62: library part C0805, "Ceramic Chip Capacitor - Standard", PackageDocument=Mar-2001, Code_IPC=2012[0805], Code_JEITA=0805, ComponentLink1Description="Manufacturer Link", ComponentLink1URL=http://www.kemet.com/, ComponentLink2Description=Datasheet, ComponentLink2URL=http://www.kemet.com/kemet/web/homepage/kechome.nsf/vapubfilesname/F3102TA.pdf/$file/F3102TA.pdf, DatasheetDocument=Mar-2001, LatestRevisionDate=19-Mar-2004, LatestRevisionNote="Silkscreen size reduced.", Note="Footprint corresponds to dimensions for bulk cassette packaging. This case size has tightened tolerances.", PackageReference=0805, Published=17-Jul-2002, Publisher="Altium Limited"
C2 C3 C4 C6 C8 C10 C11 C12 C13 C14 C17 C20 C22 C23 C24 C25 C26 C27 C28 C29 C30 C33 C37 C39 C40 C41 C42 C43 C44 C45 C46 C47 C48 C49 C50 C51 C54 C57 C60 C82 C83: library part C0603, "Ceramic Chip Capacitor - Standard", PackageDocument=Mar-2001, Code_IPC="1608 [0603]", Code_JEITA=0603, ComponentLink1Description="Manufacturer Link", ComponentLink1URL=http://www.kemet.com/, ComponentLink2Description=Datasheet, ComponentLink2URL=http://www.kemet.com/kemet/web/homepage/kechome.nsf/vapubfilesname/F3102TA.pdf/$file/F3102TA.pdf, DatasheetDocument=Mar-2001, LatestRevisionDate=19-Mar-2004, LatestRevisionNote="Silkscreen size reduced.", Note="Footprint corresponds to dimensions for bulk cassette packaging. This case size has tightened tolerances.", PackageReference=0603, Published=17-Jul-2002, Publisher="Altium Limited"
C38: library part EKA00DD410D00, "Aluminum Electrolytic Capacitor, Radial Style with Long Leads: 1000uF, 16V", ComponentLink1Description="Manufacturer Link", ComponentLink1URL=http://www.vishay.com/, ComponentLink2Description=Datasheet, ComponentLink2URL=http://www.vishay.com/docs/25014/eka.pdf, DatasheetDocument=20-Feb-2001, DrillSize="Nominal, Rounded To The Nearest 0.1mm", Note="Refer to Manufacturer's Data Sheets for other lead formations", PackageReference=CAPPR5-10X16, Published=19-Mar-2004, Publisher="Altium Limited"
C52 C56: "Aluminum Electrolytic Capacitor, Radial Style with Long Leads: 47uF, 35V", ComponentLink1Description="Manufacturer Link", ComponentLink1URL=http://www.vishay.com/, ComponentLink2Description=Datasheet, ComponentLink2URL=http://www.vishay.com/docs/25014/eka.pdf, DatasheetDocument=20-Feb-2001, DrillSize="Nominal, Rounded To The Nearest 0.1mm", Note="Refer to Manufacturer's Data Sheets for other lead formations", PackageReference=CAPPR2-5X11, Published=19-Mar-2004, Publisher="Altium Limited"
C55: "Dipped Radial Multilayer Ceramic Capacitor X7R: 100nF", PackageDocument=4-Feb-2002, ComponentLink1Description="Manufacturer Link", ComponentLink1URL=http://www.vishay.com/, DatasheetDocument=4-Feb-2002, Note="See Datasheet for other packages & tolerances", PackageReference=VP52-2.5, Published=17-Dec-2003, Publisher="Altium Limited"
C79 C80: "Aluminum Electrolytic Capacitor, Radial Style with Long Leads: 2200uF, 50V", ComponentLink1Description="Manufacturer Link", ComponentLink1URL=http://www.vishay.com/, ComponentLink2Description=Datasheet, ComponentLink2URL=http://www.vishay.com/docs/25014/eka.pdf, DatasheetDocument=20-Feb-2001, DrillSize="Nominal, Rounded To The Nearest 0.1mm", Note="Refer to Manufacturer's Data Sheets for other lead formations", PackageReference=CAPPR7.5-16X35.5, Published=19-Mar-2004, Publisher="Altium Limited"
C81: "Dipped Radial Multilayer Ceramic Capacitor COG (NPO): 100nF, 100V", PackageDocument=2-Jan-2002, ComponentLink1Description="Manufacturer Link", ComponentLink1URL=http://www.vishay.com/, DatasheetDocument=2-Jan-2002, LatestRevisionDate=19-Mar-2004, LatestRevisionNote="PCB Footprint - Drill hole diameter reduced.", PackageReference=VP60-3.6, Published=17-Dec-2003, Publisher="Altium Limited"
D1 D2: library part 10MQ060N, "Schottky Rectifier", ComponentLink1Description="Manufacturer Link", ComponentLink1URL=http://www.irf.com/, ComponentLink2Description=Datasheet, ComponentLink2URL=http://www.irf.com/product-info/datasheets/data/10MQ060N.pdf, DatasheetVersion=May-2002, PackageDescription="DO-214-AC/SMA; 2 C-Bend Leads; Body 5 x 2.7 mm, inc. leads (LxW)", PackageReference=SMA, PackageVersion="revH, May-2002", Published=17-Sep-2003, Publisher="Altium Limited"
D3: library part 824022, "TVS Diode WE-TVS-Standard, VRWM=5.0V", Reverse Stand Off Voltage=5V, ComponentLink1Description="Manufacturer URL", ComponentLink1URL=http://www.we-online.com, ComponentLink2Description=Datasheet, ComponentLink2URL=http://katalog.we-online.de/kataloge/eisos/media/pdf/824022.pdf, PackageReference=SOT23_3L, PartNumber=824022
D4 D5 D6 D7 D8 D9 D10 D11: library part MM3Z33VT1G, "Zener Voltage Regulator, 300 mW, 2-Pin SOD-323, Pb-Free, Tape and Reel", Manufacturer="On Semiconductor", Supplier Part Number 1=MM3Z33VT1GOSTR-ND, ComponentLink1Description="Manufacturer URL", ComponentLink1URL=http://www.onsemi.com/, ComponentLink2Description=Datasheet, ComponentLink2URL=http://www.onsemi.cn/pub_link/Collateral/MM3Z2V4T1-D.PDF, ComponentLink3Description="Package Specification", ComponentLink3URL=http://www.onsemi.com/pub_link/Collateral/477-02.PDF.1, DatasheetVersion="Rev. 9", Mounting Technology="Surface Mount", PackageDescription="2-Pin SOD, Body 1.7 x 1.25 mm", PackageReference=SOD-323-2-477-02, PackageVersion="Rev. H, 03/2007", Packing="Tape and Reel", PartNumber=MM3Z33VT1G, P Max (W)=0.3, RoHS=Pb-Free, Supplier 1=Digi-Key, Supplier 2=Digi-Key, Supplier 3=Digi-Key, Supplier 4=Farnell, Supplier 5=Farnell, Supplier 6=Newark, Supplier 7=Mouser, Supplier Part Number 2=MM3Z33VT1GOSCT-ND, Supplier Part Number 3=MM3Z33VT1GOSDKR-ND, Supplier Part Number 4=1431197RL, Supplier Part Number 5=1431197, Supplier Part Number 6=98H0837, Supplier Part Number 7=863-MM3Z33VT1G, VZ Typ (V)=33
D12: library part BAS321, "General-purpose Diode", ComponentLink1Description="Manufacturer Link", ComponentLink1URL=http://www.semiconductors.philips.com/, ComponentLink2Description=Datasheet, ComponentLink2URL=http://www.semiconductors.philips.com/acrobat/datasheets/BAS321_2.pdf, DatasheetVersion=9-Feb-1999, LatestRevisionDate=19-Mar-2004, LatestRevisionNote="Silkscreen size reduced.", PackageDescription="SOD-323/SC-76; 2 Leads; Body 1.7 x 1.3 mm, (LxW)", PackageReference=SOD323, PackageVersion=May-1999, Published=17-Sep-2003, Publisher="Altium Limited"
D13 D14 D15 D16 D17 D18 D19 D20 D21 D22 D23 D24 D25 D26 D27 D28: "Zener Voltage Regulator, 500 mW, 2-Pin SOD-123, Pb-Free, Tape and Reel", Manufacturer="On Semiconductor", Supplier Part Number 1=SZMMSZ12T1G-ND, ComponentLink1Description="Manufacturer URL", ComponentLink1URL=http://www.onsemi.com/, ComponentLink2Description=Datasheet, ComponentLink2URL=http://www.onsemi.com/pub_link/Collateral/MMSZ2V4T1-D.PDF, ComponentLink3Description="Package Specification", ComponentLink3URL=http://www.onsemi.com/pub_link/Collateral/425-04.PDF, DatasheetVersion="Rev. 11", Mounting Technology="Surface Mount", PackageDescription="2-Pin SOD, Body 1.6 x 2.69 mm", PackageReference=SOD-123-2-425-04, PackageVersion="Rev. G, 10/2009", Packing="Tape and Reel", PartNumber=SZMMSZ12T1G, P Max (W)=0.5, RoHS=Pb-Free, Supplier 1=Digi-Key, Supplier 2=Mouser, Supplier Part Number 2=863-SZMMSZ12T1G
FD1: library part Fiduchial, "Fiduchial mark"
K1 K2 K3 K4 K5 K6 K7 K8 K9 K10 K11 K12 K13 K14 K15 K16: "SPDT PCB relay 5Vdc coil"
L2: library part 74279202, "SMD EMI Suppression Ferrite Bead WE-CBF, Z = 120 Ohm", ComponentLink1Description="Manufacturer URL", ComponentLink1URL=http://www.we-online.com, ComponentLink2Description=Datasheet, ComponentLink2URL=http://www.we-online.de/katalog/media/pdf/74279202.pdf, DatasheetVersion=Dec-2005, Impedance="120 Ohm", PackageDescription="Chip Inductor, 2-Leads, Body 2.0 x 1.2 mm", PackageReference=SMD-0805, PartNumber=74279202
P1: library part "Header 3X2", "Header, 3-Pin, Dual row", LatestRevisionDate=17-Jul-2002, LatestRevisionNote="Re-released for DXP Platform.", Publisher="Altium Limited"
P2: library part "Header 2", "Header, 2-Pin", LatestRevisionDate=17-Jul-2002, LatestRevisionNote="Re-released for DXP Platform.", Publisher="Altium Limited"
P3 P6: library part "Header 5", "Header, 5-Pin", LatestRevisionDate=17-Jul-2002, LatestRevisionNote="Re-released for DXP Platform.", Publisher="Altium Limited"
P4: library part "Header 7X2", "Header, 7-Pin, Dual row", LatestRevisionDate=17-Jul-2002, LatestRevisionNote="Re-released for DXP Platform.", Publisher="Altium Limited"
P5: library part "Header 4X2", "Header, 4-Pin, Dual row", LatestRevisionDate=17-Jul-2002, LatestRevisionNote="Re-released for DXP Platform.", Publisher="Altium Limited"
P7 P9 P10 P12 P13 P14 P15 P17 P18 P19 P20 P21 P22 P24 P25 P26 P27: "3 pinski terminal blok konektor"
P8 P30 P31 P32 P33 P34 P35 P36 P37 P38 P39 P40 P41 P42 P43 P44 P45 P46: "2 pinski terminal blok"
P11 P23: library part "Header 2X2", "Header, 2-Pin, Dual row", LatestRevisionDate=17-Jul-2002, LatestRevisionNote="Re-released for DXP Platform.", Publisher="Altium Limited"
P16: library part "Header 8", "Header, 8-Pin", LatestRevisionDate=17-Jul-2002, LatestRevisionNote="Re-released for DXP Platform.", Publisher="Altium Limited"
P28 P29: library part "Header 6", "Header, 6-Pin", LatestRevisionDate=17-Jul-2002, LatestRevisionNote="Re-released for DXP Platform.", Publisher="Altium Limited"
P47: "Header, 9-Pin, Dual row", LatestRevisionDate=17-Jul-2002, LatestRevisionNote="Re-released for DXP Platform.", Publisher="Altium Limited"
Q1 Q2 Q3: "Power MOSFET, 200 mA, 50 V, N-Channel, 3-Pin SOT-23, Tape and Reel", Manufacturer="On Semiconductor", Package Type=SOT-23-3, Supplier Part Number 1=BSS138LT1OSCT-ND, Channel Polarity="N Channel", Ciss Typ (pF)=40, ComponentLink1Description="Manufacturer URL", ComponentLink1URL=http://www.onsemi.com/, ComponentLink2Description=Datasheet, ComponentLink2URL=http://www.onsemi.com/pub_link/Collateral/BSS138LT1-D.PDF, ComponentLink3Description="Package Specification", ComponentLink3URL=http://www.onsemi.cn/pub_link/Collateral/318-08.PDF, Configuration=Single, Coss Typ (pF)=12, Crss Typ (pF)=3.5, DatasheetVersion="Rev. 8", ID Max (A)=0.2, Mounting Technology="Surface Mount", PackageDescription="3-Pin Small Outline Transistor, Body 2.92 x 1.3 mm, Pitch 0.95 mm", PackageReference=SOT-23-3-318-08, PackageVersion="Rev. AP, 11/2009", Packing="Tape and Reel", PartNumber=BSS138LT1, PD Max (W)=0.225, Supplier 1=Digi-Key, V(BR)DSS Min (V)=50, VGS(th) Max (V)=1.5, VGS Max (V)=20
Q4 Q5 Q6 Q7 Q24 Q25 Q26 Q27 Q44 Q45 Q46 Q47 Q64 Q65 Q66 Q67: library part BC817, "NPN General-purpose Transistor", ComponentLink1Description="Manufacturer Link", ComponentLink1URL=http://www.semiconductors.philips.com/, ComponentLink2Description=Datasheet, ComponentLink2URL=http://www.semiconductors.philips.com/acrobat/datasheets/BC817_BC817W_BC337_5.pdf, DatasheetVersion=Jun-1999, LatestRevisionDate=12-Dec-2006, LatestRevisionNote="IPC-7351 Footprint Added.", PackageDescription="3-Pin SOT-23 Package 0.95 mm Pitch, 2.3 mm Lead Span", PackageReference=SOT23, PackageVersion=May-1999, Published=17-Sep-2003, Publisher="Altium Limited"
Q8 Q10 Q12 Q14 Q16 Q17 Q22 Q23 Q28 Q30 Q32 Q34 Q40 Q41 Q42 Q43 Q48 Q50 Q52 Q54 Q60 Q61 Q62 Q63 Q68 Q70 Q72 Q74 Q80 Q81 Q82 Q83: library part BC807, "PNP General-purpose Transistor", ComponentLink1Description="Manufacturer Link", ComponentLink1URL=http://www.semiconductors.philips.com/, ComponentLink2Description=Datasheet, ComponentLink2URL=http://www.semiconductors.philips.com/acrobat/datasheets/BC807_BC807W_BC327_5.pdf, DatasheetVersion=8-Apr-1999, LatestRevisionDate=12-Dec-2006, LatestRevisionNote="IPC-7351 Footprint Added.", PackageDescription="3-Pin SOT-23 Package 0.95 mm Pitch, 2.3 mm Lead Span", PackageReference=SOT23, PackageVersion=May-1999, Published=17-Sep-2003, Publisher="Altium Limited"
Q9 Q11 Q13 Q15 Q29 Q31 Q33 Q35 Q49 Q51 Q53 Q55 Q69 Q71 Q73 Q75: "HEXFET Power MOSFET", ComponentLink1Description="Manufacturer Link", ComponentLink1URL=http://www.irf.com/, ComponentLink2Description=Datasheet, ComponentLink2URL=http://www.irf.com/product-info/datasheets/data/irf540n.pdf, DatasheetVersion=May-1998, LatestRevisionDate=17-Jul-2002, LatestRevisionNote="Re-released for DXP Platform.", Note="Pin 2 is electrically connected to pin 4.", PackageDescription="TO, Thru-Hole, Vertical, Heatsink Mounted; 3 In-Line Leads; Pitch 2.54 mm", PackageReference=TO-220AB, PackageVersion=Feb-1997, Published=8-Jun-2000, Publisher="Altium Limited", Sim Note="Thermal Model provided is not called on from main Subckt."
Q18 Q19 Q20 Q21 Q36 Q37 Q38 Q39 Q56 Q57 Q58 Q59 Q76 Q77 Q78 Q79: "N-channel Enhancement Mode Vertical D-MOSFET", ComponentLink1Description="Manufacturer Link", ComponentLink1URL=http://www.semiconductors.philips.com/, ComponentLink2Description=Datasheet, ComponentLink2URL=http://www.semiconductors.philips.com/acrobat/datasheets/BSS123_3.pdf, DatasheetVersion=Apr-1995, LatestRevisionDate=12-Dec-2006, LatestRevisionNote="IPC-7351 Footprint Added.", PackageDescription="3-Pin SOT-23 Package 0.95 mm Pitch, 2.3 mm Lead Span", PackageReference=SOT23, PackageVersion=May-1999, Published=17-Sep-2003, Publisher="Altium Limited"
R1 R2 R3 R9 R10 R12 R18 R19 R22 R23 R24 R25 R26 R27 R28 R29 R30 R31 R32 R33 R34 R35 R36 R37 R38 R39 R40 R41 R42 R43 R44 R45 R46 R145: library part ERAV, "Metal Film Thermosensitive Chip Resistor, 0.56 Ohm to 10k Ohm Range, 5% Tolerance, 0603 Size, 0.063 W", PackageDocument=Mar-2003, Code_IPC="1608 [0603]", ComponentLink1Description="Manufacturer Link", ComponentLink1URL=http://www.panasonic.com/industrial/components/resistive_products.htm, ComponentLink2Description=Datasheet, ComponentLink2URL=http://www.panasonic.com/industrial/components/pdf/AOF0000CE1.pdf, LatestRevisionDate=19-Mar-2004, LatestRevisionNote="Silkscreen size reduced.", Note="If flow soldering, adjust pad width of PCB Footprint to 0.7 - 0.8 times the width of the resistor.", PackageReference=ERA-0603, Published=17-Dec-2003, Publisher="Altium Limited"
R4 R5 R6 R7 R8 R15: library part ERA3Y, "Rectangular Thick Film Chip Resistor, 10 Ohm to 330k Ohm Range, 0.1% and 0.5% Tolerance, 0603 Size, 0.063 W", PackageDocument=Mar-2003, Code_IPC="1608 [0603]", ComponentLink1Description="Manufacturer Link", ComponentLink1URL=http://www.panasonic.com/industrial/components/resistive_products.htm, ComponentLink2Description=Datasheet, ComponentLink2URL=http://www.panasonic.com/industrial/components/pdf/AOA0000CE8.pdf, LatestRevisionDate=19-Mar-2004, LatestRevisionNote="Silkscreen size reduced.", Note="If flow soldering, adjust pad width of PCB Footprint to 0.7 - 0.8 times the width of the resistor.", PackageReference=ERA-0603, Published=17-Dec-2003, Publisher="Altium Limited"
R11 R13 R14 R16 R17 R20 R21 R51 R52 R53 R54 R55 R56 R57 R58 R59 R60 R61 R62 R63 R64 R65 R66 R67 R68 R69 R70 R75 R76 R77 R78 R79 R80 R81 R82 R83 R84 R85 R86 R87 R88 R89 R90 R91 R92 R93 R94 R99 R100 R101 R102 R103 R104 R105 R106 R107 R108 R109 R110 R111 R112 R113 R114 R115 R116 R117 R118 R123 R124 R125 R126 R127 R128 R129 R130 R131 R132 R133 R134 R135 R136 R137 R138 R139 R140 R141 R142: library part ERA6Y, "Rectangular Thick Film Chip Resistor, 10 Ohm to 1M Ohm Range, 0.1% and 0.5% Tolerance, 0805 Size, 0.1 W", PackageDocument=Mar-2003, Code_IPC="2012 [0805]", ComponentLink1Description="Manufacturer Link", ComponentLink1URL=http://www.panasonic.com/industrial/components/resistive_products.htm, ComponentLink2Description=Datasheet, ComponentLink2URL=http://www.panasonic.com/industrial/components/pdf/AOA0000CE8.pdf, LatestRevisionDate=19-Mar-2004, LatestRevisionNote="Silkscreen size reduced.", Note="If flow soldering, adjust pad width of PCB Footprint to 0.7 - 0.8 times the width of the resistor.", PackageReference=ERA-0805, Published=17-Dec-2003, Publisher="Altium Limited"
R47 R48 R49 R50 R71 R72 R73 R74 R95 R96 R97 R98 R119 R120 R121 R122: library part ERJ12, "Thick Film Chip Resistor, 1 Ohm to 10M Ohm Range, 5% Tolerance, 1812 Size, 0.5 W", PackageDocument=Mar-2003, ComponentLink1Description="Manufacturer Link", ComponentLink1URL=http://www.panasonic.com/industrial/components/resistive_products.htm, ComponentLink2Description=Datasheet, ComponentLink2URL=http://www.panasonic.com/industrial/components/pdf/AOA0000CE1.pdf, LatestRevisionDate=19-Mar-2004, LatestRevisionNote="Silkscreen size reduced.", Note="If flow soldering, adjust pad width of PCB Footprint to 0.7 - 0.8 times the width of the resistor.", PackageReference=12-1812, Published=17-Dec-2003, Publisher="Altium Limited"
U1: "ARM Cortex-M3 32-bit MCU, 64 KB Flash, 20 KB Internal RAM, 37 I/Os, 48-pin LQFP, -40 to 85 degC, Tray", I/Os (High Current)=37, Operating Frequency(F) (Processor speed) (MHz)=72, Supplier Part Number 1=497-6063-ND, Supply Voltage(Vcc) min (V)=2, A/D Converter="2x12-bit (10 Channel)", ComponentLink1Description="Manufacturer URL", ComponentLink1URL=http://www.st.com/web/en/home.html, ComponentLink2Description=Datasheet, ComponentLink2URL=http://www.st.com/st-web-ui/static/active/en/resource/technical/document/datasheet/CD00161566.pdf, ComponentLink3Description="Package Specification", ComponentLink3URL=http://www.st.com/st-web-ui/static/active/en/resource/technical/document/datasheet/DM00058181.pdf, Core="ARM Cortex-M3", DatasheetVersion="Rev. 16", FLASH Size (Prog) (kB)=64, Internal RAM Size (kB)=20, Mounting Technology="Surface Mount", PackageDescription="48-Pin Low Profile Quad Flat Package, 7 x 7 mm Body, 0.5 mm Pitch", PackageReference=LQFP48, PackageVersion="Rev. 6, 06/2013", Packing=Tray, PartNumber=STM32F103C8T6, Supplier 1=Digi-Key, Supplier 2=Farnell, Supplier 3=Newark, Supplier 4=Newark, Supplier 5=Mouser, Supplier Part Number 2=1447637, Supplier Part Number 3=59M2182, Supplier Part Number 4=57P1222, Supplier Part Number 5=511-STM32F103C8T6
U2: "Programmable Voltage Reference, 2.5 to 36V, 3-Pin SOT23-3, Tape and Reel", ComponentLink1Description="Manufacturer URL", ComponentLink1URL=http://www.st.com, ComponentLink2Description=Datasheet, ComponentLink2URL=http://www.st.com/internet/com/TECHNICAL_RESOURCES/TECHNICAL_LITERATURE/DATASHEET/CD00000986.pdf, DatasheetVersion=Oct-2011, PackageDescription="3-Pin SOT-23 Package 0.95 mm Pitch, 2.4 mm Lead Span", PackageReference=SOT23-3, PackageVersion=2011
U3 U17 U18: library part B0505S/D, "1W isolated dc dc converter"